# Altium PCB PCB1.PcbDoc
Units mil, origin at the board's own origin, x right, y up, seen from the top; angles counter-clockwise.
Board outline 2025 x 1100 mil, 2 copper layers (Top Layer, Bottom Layer), stack 65.8 mil thick; 25 components, 17 nets, 63 pads, 185 vias.
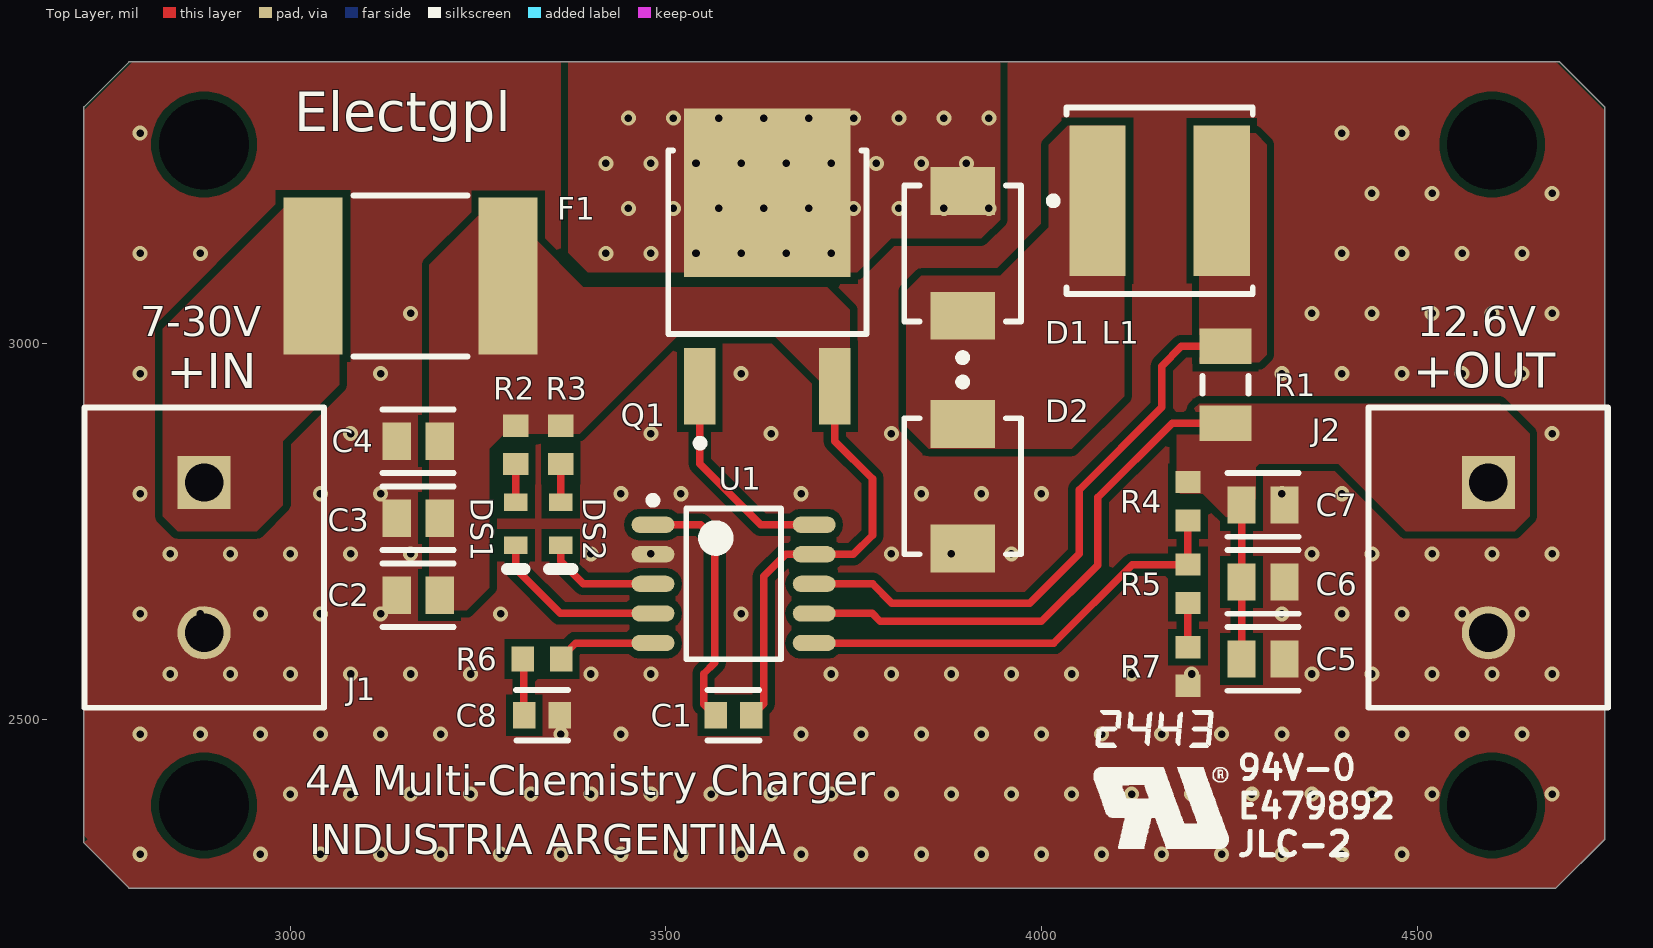
[diagram p0: Top Layer view]
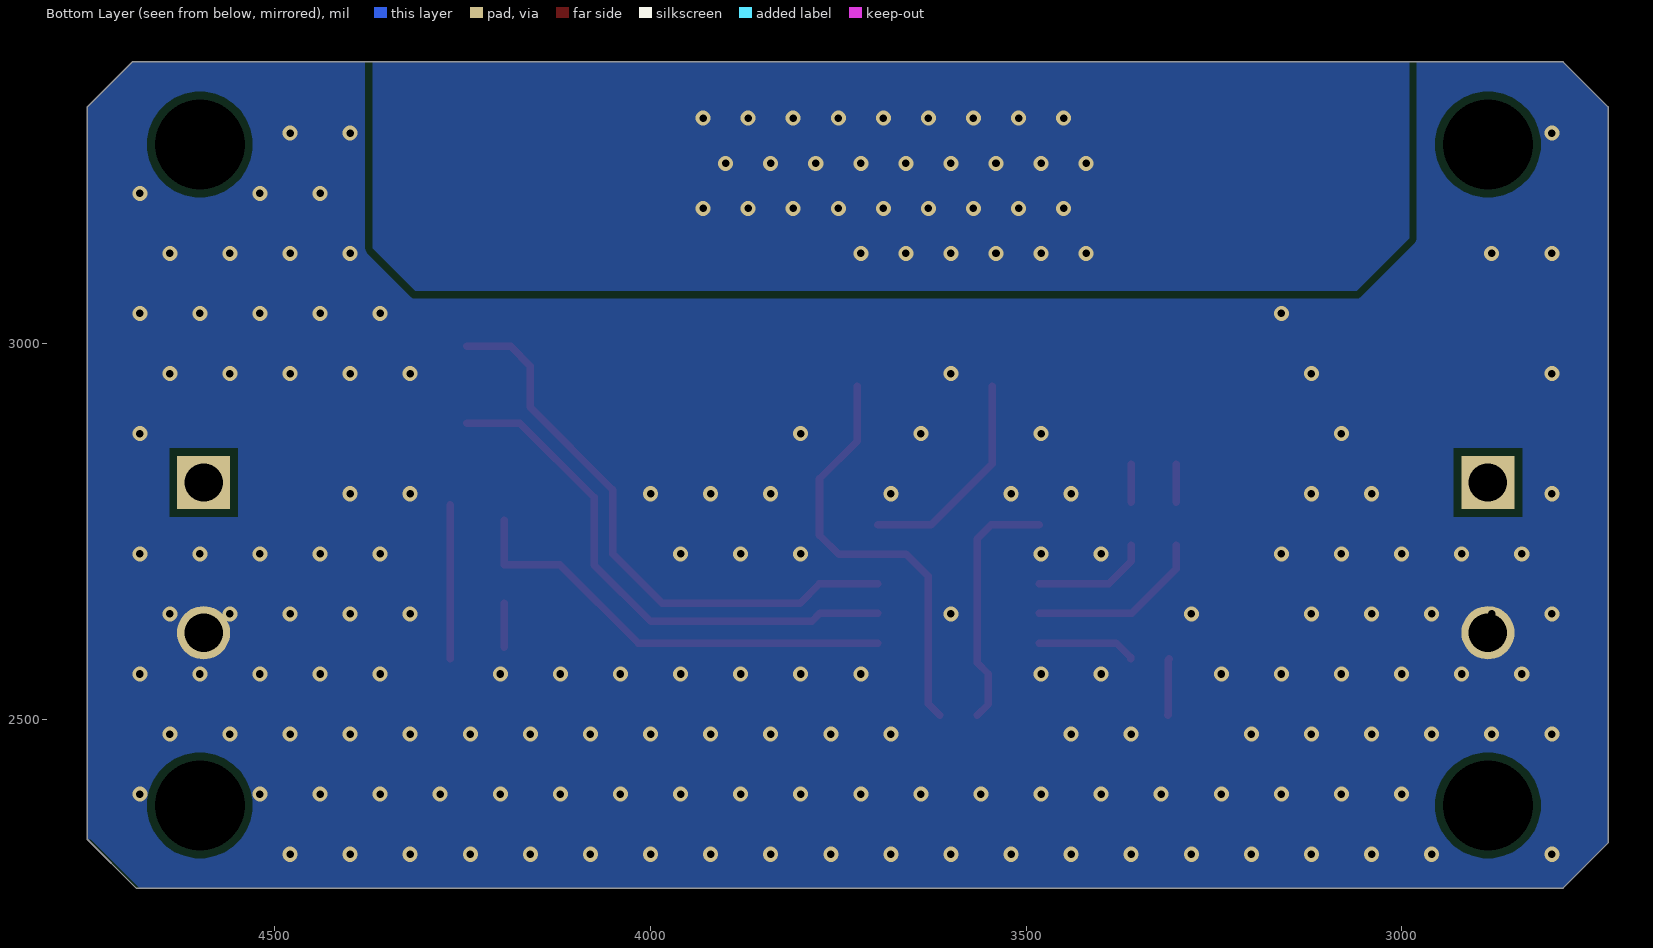
[diagram p1: Bottom Layer view, seen from below]
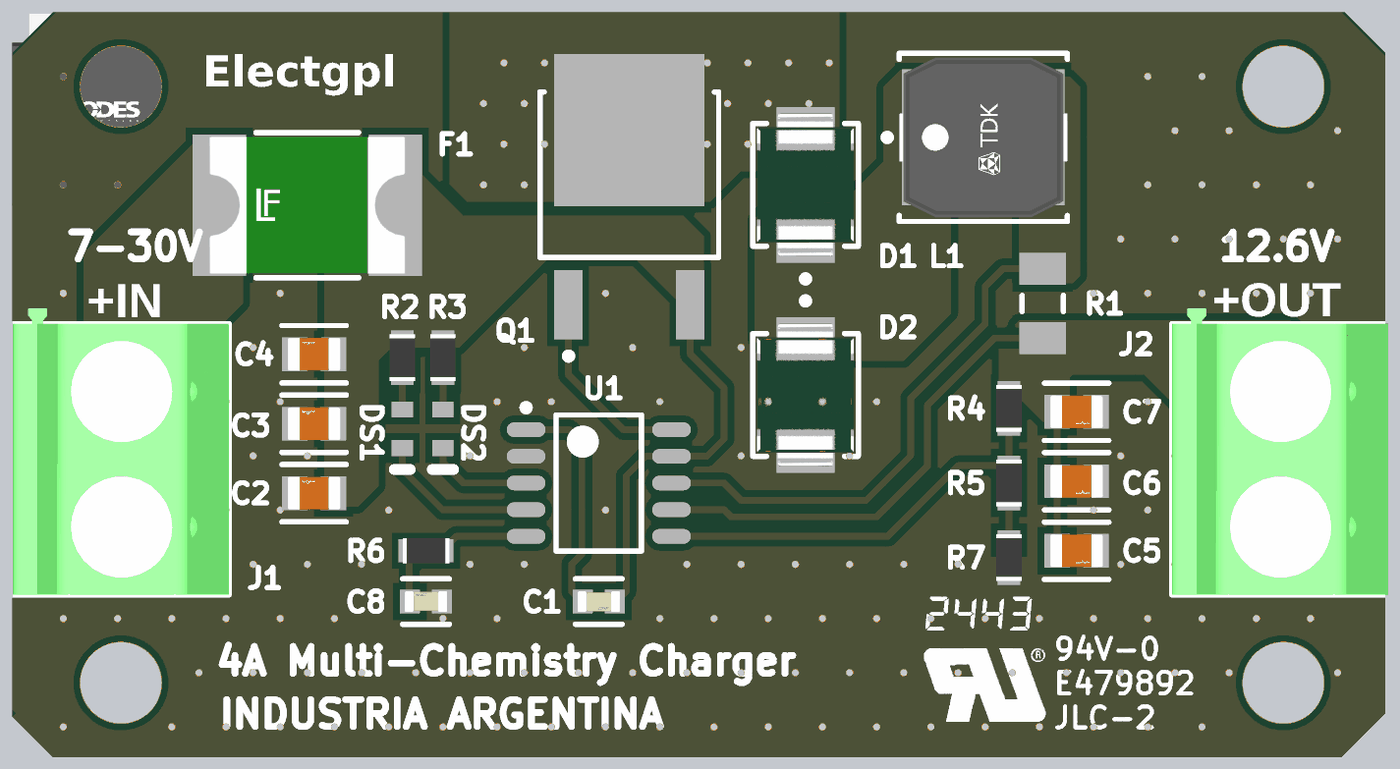
[diagram p2: 3D render of the assembled board from above, using the file's embedded part models]

## Layer stack, top to bottom
Top Solder: solder mask 0.4, Solder Resist, Dk 3.5
Top Layer: signal copper 1.4
Dielectric 1: dielectric 63, FR-4, Dk 4.8
Bottom Layer: signal copper 1.4
Bottom Solder: solder mask 0.4, Solder Resist, Dk 3.5

## Board outline
2725,2335 2725,3315 2785,3375 4690,3375 4750,3315 4750,2340 4685,2275 2785,2275

## Design rules (kind name [scope] priority, off if disabled: settings)
Clearance [All] p1: gap=10 ignorepadtopadclearanceinfootprint=FALSE
PlaneConnect [All] p1: planeconnectstyle=Direct reliefexpansion=20 reliefentries=4 reliefconductorwidth=10 reliefairgap=10
PolygonConnect [All] p1: connectstyle=Direct reliefconductorwidth=10 reliefentries=4 polygonreliefangle="90 Angle" airgapwidth=10
RoutingVias [All] p1: holewidth=28 width=50 viastyle="Through Hole" minholewidth=28 minwidth=50 maxholewidth=28 maxwidth=50
SolderMaskExpansion SolderMaskExpansion_1 [InPadClass('All Pads')] p1: expansion=4 istentingtop=FALSE
SolderMaskExpansion [IsVia] p2: expansion=4 istentingtop=TRUE
SupplyNets "Schematic Supply Nets" [InNet('GND')] p1: voltage=0.000
Width [All] p1: maxlimit=10 minlimit=10 preferedwidth=10
29 further rules are at their usual default settings.

## Components (designator, comment, footprint, x,y, rotation, side; value= is the part's Value field where it differs from the comment)
C1 "100nF" FP-C0603C-CF-MFG 3590,2505 r180 top value="0.22 μF"
C2 "10uF" FP-GRM21B-0_1-IPC_C 3170,2664.96 r180 top
C3 "10uF" FP-GRM21B-0_1-IPC_C 3170,2767.48 r180 top
C4 "10uF" FP-GRM21B-0_1-IPC_C 3170,2870 r180 top
C5 "10uF" FP-GRM21B-0_1-IPC_C 4295,2580 r0 top
C6 "10uF" FP-GRM21B-0_1-IPC_C 4295,2682.52 r0 top
C7 "10uF" FP-GRM21B-0_1-IPC_C 4295,2785.04 r0 top
C8 "220nF" FP-C0603C-CF-MFG 3335,2505 r0 top value="0.22 μF"
D1 "SS54" FP-SMB-MFG 3895,3120 r90 top
D2 "SS54" FP-SMB-MFG 3895,2810 r270 top
DS1 "BLUE" VISH-TLMX1100-2_V 3300,2760 r270 top
DS2 "RED" VISH-TLMS1000_V 3360,2760 r270 top
F1 "SMD2920-500" FP-2920L-MFG 3160,3090 r0 top value=0.12-0.41Ω
J1 "1729128" PHOE-1729128-2_V 2885,2715 r270 top
J2 "1729128" PHOE-1729128-2_V 4595,2715 r270 top
L1 "VLS6045" FP-VLS6045EX-100M-MFG 4157.32,3190 r0 top
Q1 "DMP4051LK3-13" FP-TO252-MFG 3635,3135 r0 top
R1 "0R05" RESC3216X89X51LL25T25 4245,2945 r270 top
R2 "2k2" RESC1609X55X30LL15T15 3300,2865 r90 top
R3 "2k2" RESC1609X55X30LL15T15 3360,2865 r90 top
R4 "10k" RESC1609X55X30LL15T15 4195,2790 r90 top
R5 "49R9" RESC1609X55X30LL15T15 4195,2680 r90 top
R6 "120R" RESC1609X55X30LL15T15 3335,2580 r0 top
R7 "1k" RESC1609X55X30LL15T15 4195,2570 r90 top
U1 "CN3765" SOP100P600X175-10N 3590,2680 r0 top

## Footprints (in the part's own frame and the unit in brackets; to place one, negate y for a bottom-side part, rotate by r counter-clockwise, add the part's x,y. Pads: shape width x height; smd on the part's side, far side on the other; paste and mask are expansions set on the pad)
FP-2920L-MFG [mm]
  rect 2x5.3 smd paste+0 mask+0: 1(-3.3,0) 2(3.3,0)
  silkscreen extent -1.92,-2.72 1.92,2.72, body extent -4.4,-2.82 4.4,2.82, height 0.25
FP-C0603C-CF-MFG [mm]
  rect 0.75x0.9 smd paste+0 mask+0: 1(-0.6,0) 2(0.6,0)
  silkscreen extent -0.87,-0.85 0.88,0.85, body extent -1.2,-0.6 1.2,0.6, height 0.25
FP-GRM21B-0_1-IPC_C [mil]
  rect 37.71x49.69 smd paste+0 mask+0: 1(-28.63,0) 2(28.63,0)
  silkscreen extent -47,-42 47,42, body extent -51,-31 51,31, height 10
FP-SMB-MFG [mm]
  rect 1.62x2.18 smd paste+0 mask+0: 1(-2.11,0) 2(2.11,0)
  silkscreen extent -3.65,-1.97 2.3,1.97, body extent -3.02,-2.07 3.02,2.07, height 0.25
FP-TO252-MFG [mm]
  rect 1.06x2.6 smd paste+0 mask+0: 1(-2.286,-4.875) 3(2.284,-4.875)
  rect 5.632x5.7 smd paste+0 mask+0: 4(0,1.675)
  silkscreen extent -3.35,-6.92 3.35,3.1, body extent -3.45,-6.27 3.45,4.62, height 0.25
FP-VLS6045EX-100M-MFG [mm]
  rect 1.9x5.1 smd paste+0 mask+0: 1(-2.1,0) 2(2.1,0)
  silkscreen extent -3.72,-3.15 3.15,3.15, body extent -3.25,-3.25 3.25,3.25, height 0.25
PHOE-1729128-2_V [mm] "Receptacle, 2-Leads, Body 8.1x10.16mm, Pitch 5.08mm"
  rect 1.8x1.8 hole 1.3: 1(-2.54,0)
  round 1.8 hole 1.3: 2(2.54,0)
  silkscreen extent -5.08,-4.05 5.08,4.05, body extent -5.65,-4.05 5.08,4.05, height 10.01
RESC1609X55X30LL15T15 [mm] "Chip Resistor, 2-Leads, Body 1.75x0.95mm, IPC High Density"
  rect 0.75x0.85 smd: 1(-0.65,0) 2(0.65,0)
  body extent -0.87,-0.48 0.87,0.48, height 0.55
RESC3216X89X51LL25T25 [mm] "Chip Resistor, 2-Leads, Body 3.20x1.60mm, IPC High Density"
  rect 1.2x1.75 smd: 1(-1.3,0) 2(1.3,0)
  silkscreen extent -0.3,-0.77 0.3,0.77, body extent -1.73,-0.92 1.73,0.92, height 0.89
SOP100P600X175-10N [mm] "SOP, 10-Leads, Body 4,90x3,90mm, Pitch 1,00mm, IPC Medium Density"
  oval 1.45x0.55 smd: 1(-2.725,2) 2(-2.725,1) 3(-2.725,0) 4(-2.725,-1) 5(-2.725,-2) 6(2.725,-2) 7(2.725,-1) 8(2.725,0) 9(2.725,1) 10(2.725,2)
  silkscreen extent -2.85,-2.55 1.6,2.95, body extent -2,-2.55 2,2.55, height 1.75
VISH-TLMS1000_V [mm] "SMD, 2-Leads, Body 0.8x1.6mm"
  rect 0.6x0.8 smd: 1(-0.725,0) 2(0.725,0)
  silkscreen extent 1.52,-0.4 1.52,0.4, body extent -0.8,-0.4 0.8,0.4, height 0.65
VISH-TLMX1100-2_V [mm] "SMD, 2-Leads, Body 1.6x0.8mm"
  rect 0.6x0.8 smd: 1(-0.725,0) 2(0.725,0)
  silkscreen extent 1.53,-0.3 1.53,0.3, body extent -0.8,-0.4 0.8,0.4, height 0.65

## Part data
C1 C8: library part CMP-2006-03146-2, "CAP CER 0.22UF 25V 10% X7R 0603", Capacitance="0.22 μF", Manufacturer=KEMET, Manufacturer Part Number=C0603C224K3RACTU, Package=C0603C-CF, Temperature="-55°C to +125°C", Temperature Characteristic=X7R, Temperature Coefficient=30ppm/°C, Temperature Range High=+125°C, Temperature Range Low=-55°C, Tolerance=0.1, Voltage Rating="25 V", Automotive=Yes, Automotive Grade="Grade 1", Category=Cap, ComponentLink2Description=Datasheet, ComponentLink2URL=https://api.kemet.com/component-edge/download/datasheet/C0603C100J5GACAUTO.pdf, Device Class L1="Passive Components", Device Class L2=Capacitors, Device Class L3="Ceramic Capacitors", Digikey Description="CAP CER 0.22UF 25V 10% X7R 0603", Height=0.87mm, Lead Free=Yes, Material=Ceramic, Mouser Description="Multilayer Ceramic Capacitors MLCC - SMD/SMT 25volts 0.22uF X7R 10%", Octopart=https://octopart.com/c0603c224k3ractu-kemet-129141, RoHS=TRUE
C2 C3 C4 C5 C6 C7: library part CMP-2007-03453-2, "Chip Multilayer Ceramic Capacitors for General Purpose, 0805, 10uF, X5R, 15%, 10%, 16V", Case Code (Imperial)=0805, Case Code (Metric)=2012, Dielectric=X5R, Max Operating Temperature=85°C, Min Operating Temperature=-55°C, Package Quantity=1, Tolerance=10%, Voltage=16V, Capacitance=10uF, Case/Package=0805, Depth=1.25mm, Height=1.25mm, Lead Free="Lead Free", Length=2mm, Material=Ceramic, Mount="Surface Mount", Packaging="Tape and Reel", Radiation Hardening=No, REACH SVHC="No SVHC", Termination=SMD/SMT, Thickness=0.053inch, Voltage Rating=16V, Voltage Rating (DC)=16V, Width=1.25mm
D1 D2: library part CMP-12187-000024-1, "DIODE SCHOTTKY 150V 3A SMB", Forward Current=3A, Manufacturer=STMicroelectronics, Manufacturer Part Number=STPS3150U, Max Junction Temp=+175°C, Max Repetitive Reverse Voltage=150V, Max Surge Forward Current=80A, Package=SMB, Peak Reverse Current=0.4uA, Temperature="to +175°C", Automotive=No, Category=Diode, ComponentLink2Description=Datasheet, ComponentLink2URL=https://www.st.com/resource/en/datasheet/stps3150.pdf, Device Class L1="Discrete Semiconductors", Device Class L2=Diodes, Device Class L3="Schottky Diodes", Digikey Description="DIODE SCHOTTKY 150V 3A SMB", Height=2.65mm, Lead Free=Yes, Mouser Description="Schottky Diodes & Rectifiers 3.0 Amp 150 Volt", Octopart=https://octopart.com/stps3150u-stmicroelectronics-39552976, RoHS=TRUE, Standoff Height=0.05mm, Temperature Range High=+175°C
DS1: library part CMP-1666-00028-1, "Blue LED, 10 mA, 3.9 V, -40 to 100 degC, 2-Pin SMD (0603), RoHS, Tape and Reel", Capacitance="10 nF", Case\Package=Radial, Max Operating Temperature="125 degC", Min Operating Temperature="-55 degC", Package Quantity=500, Tolerance=10%, Type (Capacitors)=X7R, Voltage Rating="100 V", ComponentLink1Description="Manufacturer URL", ComponentLink1URL=http://www.vishay.com/, ComponentLink2Description=Datasheet, ComponentLink2URL=http://download.siliconexpert.com/pdfs/2016/8/7/12/43/26/667/vsh_/manual/379263299541529tlmb1100.pdf, DatasheetVersion="Rev. 2.7, 03/2016", Height="2.54 mm", Lead Pitch="2.54 mm", Length="5.33 mm", Mount="Through Hole", PackageDescription="2-Pin Surface Mount Device, Body 1.6 x 0.8 mm", PackageReference=0603, Packaging=Bulk, Pins=2, Radiation Hardening=No, REACH SVHC="No SVHC", RoHSCompliant=true, Width="3.81 mm"
DS2: library part CMP-2000-07254-1, "Low Current LED, 40 mW, 1.8 V, -40 to 100 degC, 2-Pin SMD (0603), RoHS, Tape and Reel", Forward Current If=2mA, Forward Voltage=1.8V, LED Colour=Red, Manufacturer=Vishay, Package Description="2-Pin Surface Mount Device, Body 1.6 x 0.8 mm", Package Reference=TLMS1000, Automotive Qualification Standard=AEC-Q100, Bulb Size=1.6mmx0.8mm, Datasheet URL=https://datasheet.ciiva.com/5798/1698881-5798337.pdf, Datasheet Version="Rev. 1.7, 02/2011", LED Mounting=SMD, Lens Shape=Rectangular, Luminous Intensity=4mcd, Manufacturer URL=http://www.vishay.com/, Mounting Technology=SurfaceMount, MSL=MSL2-1year, Packaging=CutTape, Product Range=-, SVHC=ToBeAdvised, Viewing Angle=80°, Wavelength Typ=636nm
F1: library part CMP-08606-000028-1, "PTC RESET FUSE 60V 1.1A 2920", Ambient Temperature Range High=+85°C, Ambient Temperature Range Low=-40°C, Current Rating=20A, Hold Current=1.1A, Manufacturer=Littelfuse, Manufacturer Part Number=2920L110/60MR, Package=2920L, Resistance=0.12-0.41Ω, Temperature="-40°C to +85°C", Trip Current=2.2A, Voltage Rating=60V, Automotive=No, Category=Fuse, ComponentLink2Description=Datasheet, ComponentLink2URL=https://m.littelfuse.com/~/media/electronics/datasheets/resettable_ptcs/littelfuse_ptc_2920l_datasheet.pdf.pdf, Device Class L1="Circuit Protection", Device Class L2="PTC Resettable Fuses", Device Class L3=unset, Digikey Description="PTC RESET FUSE 60V 1.1A 2920", Height=2mm, Lead Free=Yes, Octopart=https://octopart.com/2920l110%2F60mr-littelfuse-75250824, RoHS=TRUE, Temperature Range High=+85°C, Temperature Range Low=-40°C, Trip Time=0.5s
J1 J2: library part CMP-2000-05815-1, "PCB Terminal Block, 13.5 A, 400 V, 2-Pin THD, RoHS, Bulk", Current Rating=13500mA, Manufacturer="Phoenix Contact", Package Description="2-Pin Through Hole Device, Body 8.1 x 10.16 mm, Pitch 5.08 mm", Package Reference=1729128-2, Package Version=03/2015, Voltage Rating=400V, Datasheet URL=https://datasheet.ciiva.com/16046/1729128-16046181.pdf, Datasheet Version=12/2013, Manufacturer URL=http://www.phoenixcontact.com/, Mounting Technology=ThroughHole, No. of Positions=2, No. of Rows=1, Orientation=Horizontal, Package URL=https://www.phoenixcontact.com/online/portal/pi/pxc/product_detail_page/!ut/p/b1/3VdJjqNKFDxLH8AFycySyWY2ozFsEPOMMQaDOX1XedGL_1Vdm5YXJleknhSKeBkvI6EA8ncAo3AYoDhBQGco6KN7VURTdemj9us_IEKEZo_YHiPAEWEFmDGOHMORkqKYCORBZxgL7ZoaZYcbFFUZ3fqxSY6GOuxydWUuHqz1ynmMFygu583Bob0Ewr6Sd_l-5m-kAueHiB0jpRwZwe58wwtkpxtMYd_LmGcDRU02dRNEyWt6Y2ti5pSyJ_reIkzIulrqApdnbT11V5jnCKbYNCvhEM1MCpPByat_X379-iThf08CI5GfOPqfBeS3BRoBOdD55AKVv0iLwCMq-2BrzXWSGRH7pUGD9uwXQjiph3xL0DKQwdGa0JImiIOmBNOestqgwTHSSs2oOep-78apyXQBvNi8ZLaFjvjWvcaUEBu0MC6Wbe-d6mB0FAebo2lUWinqYaZs5DAYzV0RP9yitUjnGJ0iI9xhZkT42OCQNUJJhkgWINNQLP2JFP6OpMg3JCVg70jqHT0lvKOnhHf0lPuOnnLf0VPuWx6_dxwUIvwk5WMkT0kLL1mh61l2yZVSzG3pYV_bqo-mj6uMKwKwdnnW8Jh5RTOJzMOA5c-eJDaZQw4mTMPH02PvS_ZAqNVjVTo2WyYLkwH_KU1mmmG5kjRhDqPXLwwVHvVOjCM60-fpXvTDfMGW1PVFVS1r4e4yVDk4ZdNbkUHvqPqQSeian4UD39fNKmachqdJ1NJbyk8rXT9mXTvPk3oE5meulKGgiruPJek-4I9hTT6G8ZLOyRSm2RRVbThERQad5OS28hdt4YW4vG0stgYYzsWsK4_7y6DZMjJSCqri1kyiZR5vD7pwIrNR7QwPHTcLTI5qT7eRlpHrdGiupYlqQDJ7zy_CND8fWWBoLRXxk1RVcXiBQwbTD4Xi7KL-FuO94t9xaqweXzH, Packing=Bulk, PartNumber=1729128, Pitch=5.08mm, RoHS=TRUE
L1: library part CMP-08253-000184-1, "FIXED IND 10UH 3.4A 61 MOHM SMD", Case/Package=Nonstandard, Current Rating=3.4A, DC Resistance (DCR)=61mR, Inductance=10uH, Inductance tolerance=20%, Max Operating Temperature=105°C, Min Operating Temperature=-40°C, Resistor Type=Wirewound, Saturation Current=3.9A, Test Frequency=100kHz, Core Material=Ferrite, Height - Seated (Max)=0.177inch, Lead Free="Lead Free", Length=0.236inch, Mount="Surface Mount", Packaging="Cut Tape", REACH SVHC="No SVHC", RMS Current (Irms)=3.4A, RoHS Compliant=Yes, Shielding=Shielded, Tolerance=20%, Width=0.236inch
Q1: library part CMP-12801-000019-1, "MOSFET P-CH 40V 7.2A DPAK", Continuous Drain Current=-7.2A, Drain To Source Breakdown Voltage=-40V, Drain To Source Resistance=0.041Ω, Gate To Source Voltage=20V, Input Capacitace At Vds="674pF @ -20V", Manufacturer="Diodes Inc.", Max Forward Diode Voltage=-1.2V, Max Junction Temp=+150°C, Package=TO252, Power Dissipation=4.18W, Pulse Drain Current=-28.9A, Temperature="-55°C to +150°C", Temperature Range Low=-55°C, Typ Forward Diode Voltage=-0.98V, Automotive=No, Category=Trans, ComponentLink2Description=Datasheet, ComponentLink2URL=https://www.diodes.com/assets/Datasheets/DMP4051LK3.pdf, Depletion Mode=False, Device Class L1="Discrete Semiconductors", Device Class L2=Transistors, Device Class L3=MOSFETs, Digikey Description="MOSFET P-CH 40V 7.2A DPAK", Drain To Source Voltage=-40V, Footprint Url=https://www.diodes.com/assets/Package-Files/TO252-DPAK.pdf, Gate Charge At Vgs="14nC @ -10V", Height=2.52mm, Lead Free=Yes, Manufacturer Part Number=DMP4051LK3-13, Mouser Description="MOSFET ENHANCE MODE MOSFET 40V P-CHANNEL", Number Of Channels=1, Number Of P Channels=1, Octopart=https://octopart.com/dmp4051lk3-13-diodes+inc.-17931392, Reverse Recovery Charge=841nC, Reverse Recovery Time=138ns, RoHS=TRUE, Rthja Max=29.9°C/W, Standoff Height=0mm, Temperature Range High=+150°C, Threshold Vgs Max=-3V, Threshold Vgs Min=-1V, Transconductance=16.6S, Turn Off Delay Time=25.1ns, Turn On Delay Time=2.3ns
R1: library part CMP-2003-04361-1, Manufacturer="Vishay Dale", Part Number=WSL1206R0500FEA
R2 R3 R4 R5 R6 R7: library part CMP-1012-00623-3, "Chip Resistor, 10 KOhm, +/- 1%, 0.1 W, -55 to 155 degC, 0603 (1608 Metric), RoHS, Tape and Reel", Case Code (Imperial)=0603, Case Code (Metric)=1608, Manufacturer=Panasonic, Max Operating Temperature=155degC, Max Power Dissipation=100mW, Min Operating Temperature=-55degC, Package Description="2-Pin Surface Mount Device, Body 1.6 x 0.85 mm", Package Quantity=1, Package Reference=603, Resistance=10KOhm, Temperature Coefficient=100ppm\/degreesC, Tolerance=1%, Voltage Rating=75V, Case\/Package=0603, Composition=ThickFilm, Contact Plating=Tin, Datasheet URL=https://industrial.panasonic.com/cdbs/www-data/pdf/RDA0000/AOA0000C304.pdf, Datasheet Version=02/2017, Depth=0.8mm, Height=0.45mm, Lead Free=LeadFree, Length=1.6mm, Manufacturer URL=http://www.panasonic.com/, Military Standard=Not, Mount=SurfaceMount, Mounting Technology=SurfaceMount, Number of Pins=2, Number of Terminations=2, Packaging=TapeandReel, Power Rating=100mW, Radiation Hardening=No, REACH SVHC=NoSVHC, RoHSCompliant=true, Termination=SMD/SMT, Voltage Rating (DC)=75V, Width=0.031inch
U1: library part CMP-019-00051-1, "SSOP-10 Battery Management ICs ROHS"

## Free pads (board coordinates)
  round 100 hole 120: 5(2885,2385) 5(2885,3265) 5(4600,2385) 5(4600,3265)

## Via types
v1: diameter 20, hole 10, Top Layer to Bottom Layer, tented both sides, 185 vias

## Nets (pads, with @x,y where several pads share a name; then routed paths per layer and width w, separated by ;. In a path a pad name is that pad's centre, name@x,y a point inside that pad or via, vN(x,y) a via of type N, cw(c..) or ccw(c..) an arc to the next point about the centre after c; other vN are vias at no path point)
GND: C2.2 C3.2 C4.2 C5.2 C6.2 C7.2 C8.2 D2.2 J1.2 J2.2 R7.1 U1.2
  other v1: 2800,2320 2960,2320 3040,2320 3120,2320 3200,2320 3280,2320 3360,2320 3440,2320 3520,2320 3600,2320 3680,2320 3760,2320 3840,2320 3920,2320 4000,2320 4080,2320 4160,2320 4240,2320 4320,2320 4400,2320 4480,2320 3000,2400 3080,2400 3160,2400 3240,2400 3320,2400 3400,2400 3480,2400 3560,2400 3640,2400 3720,2400 3800,2400 3880,2400 3960,2400 4040,2400 4120,2400 4200,2400 4280,2400 4360,2400 4440,2400 4520,2400 4680,2400 2800,2480 2880,2480 2960,2480 3040,2480 3120,2480 3200,2480 3360,2480 3440,2480 3680,2480 3760,2480 3840,2480 3920,2480 4000,2480 4080,2480 4160,2480 4240,2480 4320,2480 4400,2480 4480,2480 4560,2480 4640,2480 2840,2560 2920,2560 3000,2560 3080,2560 3160,2560 3240,2560 3400,2560 3480,2560 3720,2560 3800,2560 3880,2560 3960,2560 4040,2560 4120,2560 4200,2560 4360,2560 4440,2560 4520,2560 4600,2560 4680,2560 2800,2640 2880,2640 2960,2640 3040,2640 3120,2640 3280,2640 3600,2640 4320,2640 4400,2640 4480,2640 4560,2640 4640,2640 2840,2720 2920,2720 3000,2720 3080,2720 3160,2720 3400,2720 3480,2720 3800,2720 3880,2720 3960,2720 4360,2720 4440,2720 4520,2720 4600,2720 4680,2720 2800,2800 3040,2800 3120,2800 3440,2800 3520,2800 3680,2800 3840,2800 3920,2800 4000,2800 4320,2800 4400,2800 3080,2880 3480,2880 3640,2880 3800,2880 4680,2880 2800,2960 3120,2960 3600,2960 4320,2960 4400,2960 4480,2960 4560,2960 4640,2960 3160,3040 4360,3040 4440,3040 4520,3040 4600,3040 4680,3040 2800,3120 2880,3120 4400,3120 4480,3120 4560,3120 4640,3120 4440,3200 4520,3200 4680,3200 2800,3280 4400,3280 4480,3280
NetC1_1: C1.1 C2.1 C3.1 C4.1 F1.2 Q1.3 R2.2 R3.2 U1.9 | length 577.8
  Top Layer w10: C1.1@3615,2505 3630.35,2520.35 3630.35,2690.35 3659.37,2719.37 U1.9 3749.37,2719.37 3775,2745 3775,2820 3724.92,2870.08 Q1.3
NetC1_2: C1.2 U1.1 | length 337.5
  Top Layer w10: U1.1 3546.26,2758.74 3565,2740 3565,2575 3550,2560 3550,2520 C1.2@3565,2505
NetC5_1: C5.1 C6.1 C7.1 J2.1 R1.2 R4.2 U1.7 | length 919.2
  Top Layer w10: U1.7 3774.37,2640.63 3785,2630 4000,2630 4075,2705 4075,2795 4173.82,2893.82 R1.2 ; C5.1 C6.1 C7.1
NetC8_1: C8.1 R6.1 | length 75.8
  Top Layer w10: R6.1 3310.39,2579.02 3310.39,2505.98 C8.1
NetD1_1: D1.1 D2.1 L1.1
NetD1_2: D1.2 Q1.4
  other v1: 3420,3120 3480,3120 3540,3120 3600,3120 3660,3120 3720,3120 3450,3180 3510,3180 3570,3180 3630,3180 3690,3180 3750,3180 3810,3180 3870,3180 3930,3180 3420,3240 3480,3240 3540,3240 3600,3240 3660,3240 3720,3240 3780,3240 3840,3240 3900,3240 3450,3300 3510,3300 3570,3300 3630,3300 3690,3300 3750,3300 3810,3300 3870,3300 3930,3300
NetDS1_1: DS1.1 R2.1 | length 50.9
  Top Layer w10: DS1.1 R2.1
NetDS1_2: DS1.2 U1.4 | length 238.8
  Top Layer w10: DS1.2 3300,2700 3359.37,2640.63 U1.4
NetDS2_1: DS2.1 R3.1 | length 50.9
  Top Layer w10: DS2.1 R3.1
NetDS2_2: DS2.2 U1.3 | length 156.6
  Top Layer w10: DS2.2 3360,2710 3390,2680 U1.3
NetF1_1: F1.1 J1.1
NetL1_2: L1.2 R1.1 U1.8 | length 782.1
  Top Layer w10: U1.8 3775,2680 3800.86,2654.14 3984.14,2654.14 4050,2720 4050,2805 4160,2915 4160,2970 4186.18,2996.18 R1.1
NetQ1_1: Q1.1 U1.10 | length 289
  Top Layer w10: Q1.1 3545,2840 3626.26,2758.74 U1.10
NetR4_1: R4.1 R5.2 U1.6 | length 599.8
  Top Layer w10: U1.6 4016.26,2601.26 4120.59,2705.59 R5.2 R4.1
NetR5_1: R5.1 R7.2 | length 58.8
  Top Layer w10: R7.2 R5.1
NetR6_2: R6.2 U1.5 | length 132.1
  Top Layer w10: R6.2 3360.59,2581.97 3379.88,2601.26 U1.5

## Polygon pours and split planes (outlines as drawn)
GND on Top Layer "NONET_L-01_P-001" (solid, pour order 6): 2730,2340 2725,2345 2725,3310 2790,3375 4685,3375 4750,3310 4750,2340 4685,2275 2785,2275 2725,2335
NetL1_2 on Top Layer "NONET_L-01_P-001" (solid, pour order 5): 4205,3280 4285,3280 4300,3265 4300,2985 4290,2975 4210,2975 4210,3270 4205,3275
NetF1_1 on Top Layer "NONET_L-01_P-001" (solid, pour order 4): 2830,3020 2995,3185 3065,3185 3065,2945 2990,2870 2990,2785 2955,2750 2850,2750 2830,2770 2830,2785
NetC1_1 on Top Layer "NONET_L-01_P-001" (solid, pour order 3): 3745,3045 3715,3075 3390,3075 3325,3140 3325,3180 3260,3180 3185,3105 3185,2650 3190,2645 3235,2645 3265,2675 3265,2860 3285,2880 3385,2880 3515,3010 3645,3010 3705,2950 3705,2910 3745,2910
NetC5_1 on Top Layer "NONET_L-01_P-001" (solid, pour order 2): 4180,2805 4180,2890 4210,2920 4610,2920 4650,2880 4650,2770 4630,2750 4485,2750 4395,2840 4290,2840 4285,2835 4285,2580 4285,2555 4250,2555 4250,2765 4215,2800 4185,2800
NetD1_1 on Top Layer "NONET_L-01_P-001" (solid, pour order 1): 3820,3070 3840,3090 3945,3090 4010,3155 4010,3265 4035,3290 4110,3290 4110,2930 4040,2860 3850,2860 3820,2890
NetD1_2 on Top Layer "NONET_L-01_P-001" (solid, pour order 0): 3395.58,3095 3370,3120.58 3370,3375 3945,3375 3945,3165 3920,3140 3800,3140 3755,3095
NetD1_2 on Bottom Layer "NONET_L-01_P-001" (solid, pour order 7): 2990,3375 2990,3140 3060,3070 4313.32,3070 4370,3126.68 4370,3375
GND on Bottom Layer "NONET_L-01_P-001" (solid, pour order 8): 2725,3315 2785,3375 4690,3375 4750,3315 4750,2340 4745,2340 4680,2275 2785,2275 2725,2335

## Silkscreen, mask and mechanical layers (free items; w line width, h text height)
Top Overlay:
  drawing of 38 lines, arcs and shapes, not listed
  text "Electgpl" at 3005,3265.33 h90
  text "7-30V" at 2800,3010 h40
  text "12.6V" at 4500,3010 h40
  text "+OUT" at 4495,2925.96 h80
  text "+IN" at 2835,2925 h80
  text "4A Multi-Chemistry Charger" at 3020,2398.33 h40
  text "INDUSTRIA ARGENTINA" at 3025,2320 h40
Mechanical 1:
  the board outline again, w10